# EAGLE board deleteme (EAGLE 7.2.0)
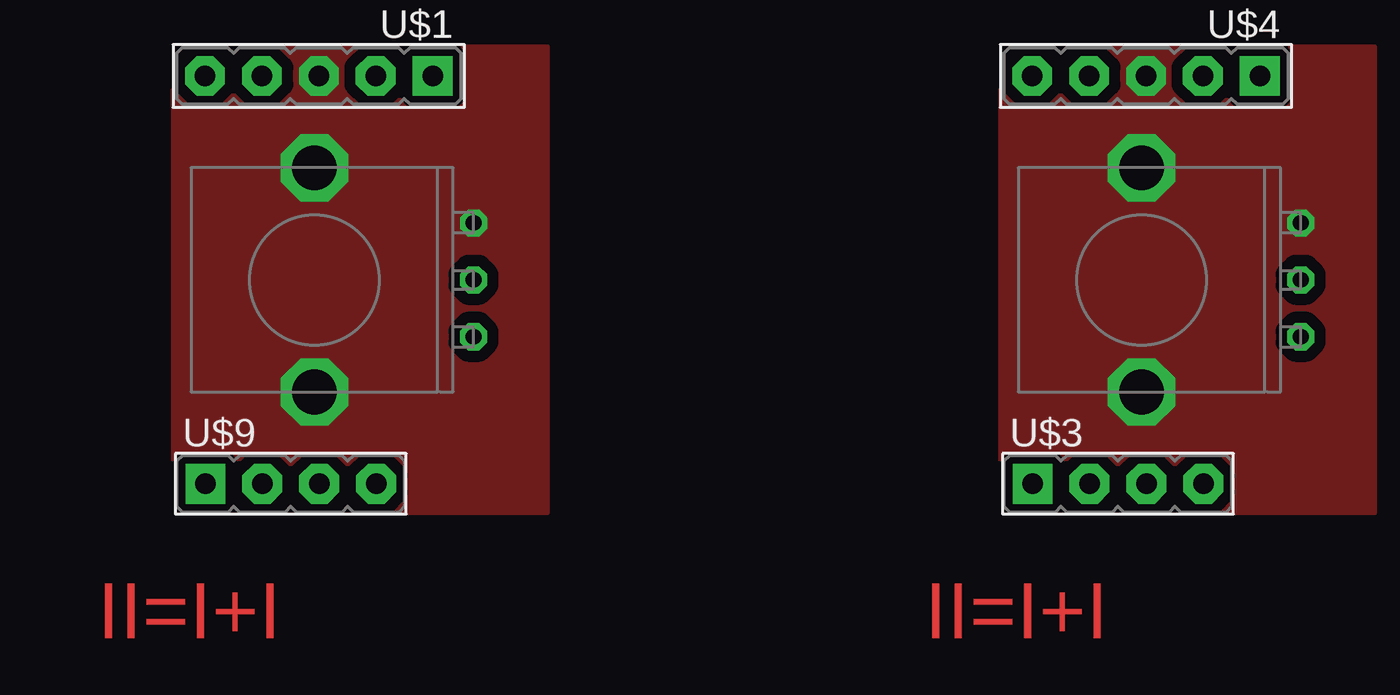
[diagram p0: board, top side]
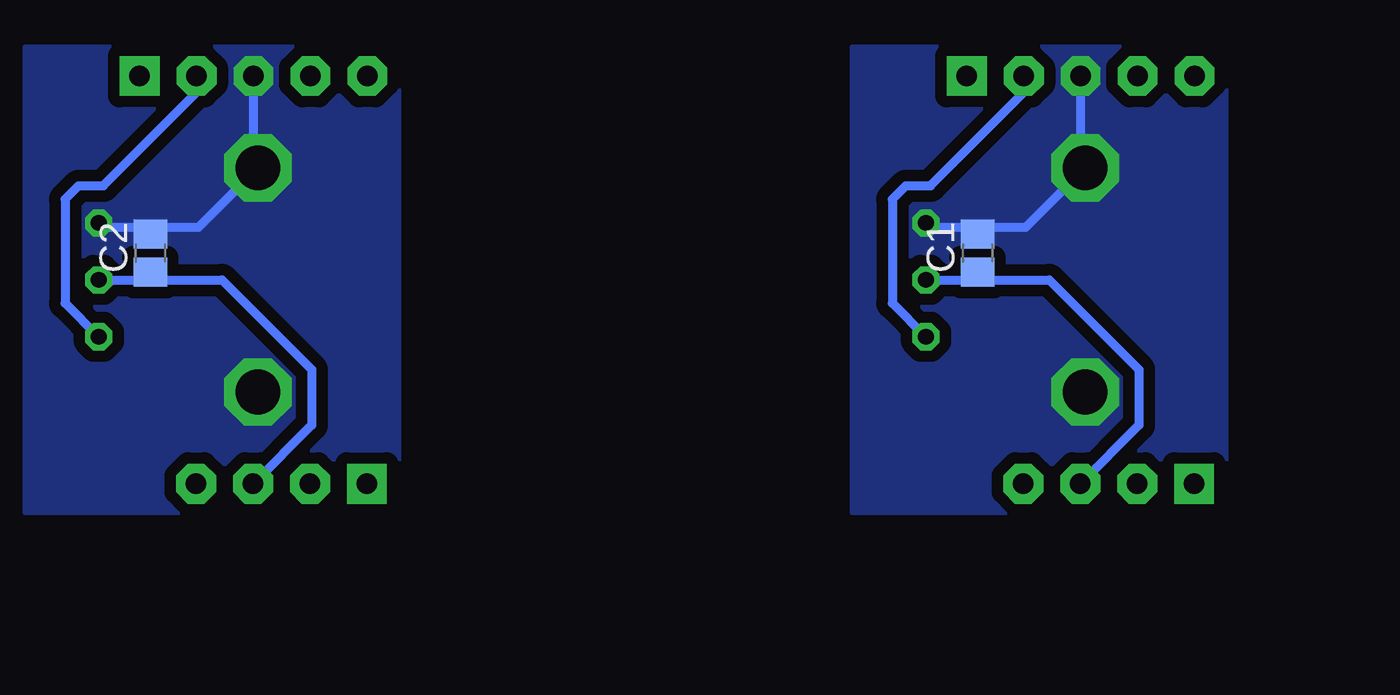
[diagram p1: board, bottom side, seen from below]

No outline drawn. Coordinates in mm, seen from the top.
Copper layers (1*16): Top 0.035mm / dielectric 1.5mm / Bottom 0.035mm
Design rules "default": minimum track width 10mil, minimum drill 24mil, track to track 8mil, track to pad 8mil, pad to pad 8mil, via to via 8mil, smd to smd 8mil, copper to edge 40mil, drill to drill 8mil, minimum pad ring 10mil, minimum via ring 8mil, stop-mask expansion 4mil, vias tented up to drill 0mil, thermal gap 10mil

## Footprints (pad centres in the part's own frame; a part is rotated, then mirrored left to right if it is on the bottom)
C0805 = smd 1.3 x 1.5: 1 -0.85,0; 2 0.85,0
JUMPER5M = drill 0.914 pad 1.778 square: 1 -5.08,0 | drill 0.914 pad 1.778 octagon: 2 -2.54,0; 3 0,0; 4 2.54,0; 5 5.08,0
POTENTIOMETER-RK09 = drill 0.7 octagon: 1 -2.54,7.1; 2 0,7.1; 3 2.54,7.1 | drill 2 octagon: GND1 -5,0; GND2 5,0
JUMPER4M = drill 0.914 pad 1.778 square: 1 -3.81,0 | drill 0.914 pad 1.778 octagon: 2 -1.27,0; 3 1.27,0; 4 3.81,0

## Placement (x,y rotation side)
C1  100 nF  [C0805]  15.3,11.7 90 bottom
C2  100 nF  [C0805]  52.2,11.7 90 bottom
U$1  JUMPER5M  [JUMPER5M]  10.7,19.6 180 top
U$2  POTENTIOMETER-RK09  [POTENTIOMETER-RK09]  10.5,10.5 270 top
U$3  JUMPER4M  [JUMPER4M]  46.35,1.4 0 top
U$4  JUMPER5M  [JUMPER5M]  47.6,19.6 180 top
U$5  POTENTIOMETER-RK09  [POTENTIOMETER-RK09]  47.4,10.5 270 top
U$9  JUMPER4M  [JUMPER4M]  9.45,1.4 0 top

## Library data of the parts
C1 C2 = resistor
U$1-U$5 U$9 = !stavebnice03

## Nets
GND: C1.2 U$1.3 U$2.1 U$2.GND1 U$2.GND2
GND1: C2.2 U$4.3 U$5.1 U$5.GND1 U$5.GND2
N$1: C1.1 U$2.2 U$9.3
N$2: U$1.2 U$2.3
N$3: C2.1 U$3.3 U$5.2
N$4: U$4.2 U$5.3

## Tracks (layer width: path | path; a pad name or v marks a point on that pad's centre or on a via)
GND
  Bottom 0.406: U$1.3 10.7,15.5 U$2.GND1 13.15,12.85 15.4,12.85 | U$2.1 17.41,12.85 15.4,12.85 | C1.2 15.3,12.75 15.4,12.85
  pour Bottom (isolate 0.508, rank 2, no thermals): 4.2,0.1 4.2,20.9 20.9,20.9 20.9,0.1
  pour Top (isolate 0.508, rank 2, no thermals): 4.2,0.1 4.2,20.9 20.9,20.9 20.9,0.1
GND1
  Bottom 0.406: U$4.3 47.6,15.5 U$5.GND1 50.05,12.85 52.3,12.85 | U$5.1 54.31,12.85 52.3,12.85 | C2.2 52.2,12.75 52.3,12.85
  pour Bottom (isolate 0.508, rank 2, no thermals): 41.1,0.1 41.1,20.9 57.8,20.9 57.8,0.1
  pour Top (isolate 0.508, rank 2, no thermals): 41.1,0.1 41.1,20.9 57.8,20.9 57.8,0.1
N$1
  Bottom 0.406: U$9.3 8.1,4.02 8.1,6.5 12.1,10.5 15.4,10.5 | U$2.2 15.4,10.5 | C1.1 15.3,10.6 15.4,10.5
N$2
  Bottom 0.406: U$2.3 19.1,9.46 19.1,14.1 18.5,14.7 17.4,14.7 13.2,18.9 13.2,19.56 U$1.2
N$3
  Bottom 0.406: U$3.3 45,4.02 45,6.5 49,10.5 52.3,10.5 | U$5.2 52.3,10.5 | C2.1 52.2,10.6 52.3,10.5
N$4
  Bottom 0.406: U$5.3 56,9.46 56,14.1 55.4,14.7 54.3,14.7 50.1,18.9 50.1,19.56 U$4.2

## Text on the board
Top: II=I+I | II=I+I
centerDrill: potentiometer | potentiometer